# Altium PCB LED_Running_Light.PcbDoc
Units mil, origin at the board's own origin, x right, y up, seen from the top; angles counter-clockwise.
Board outline 6000 x 4000 mil, 2 copper layers (Top Layer, Bottom Layer); 27 components, 17 nets, 57 pads, 0 vias.
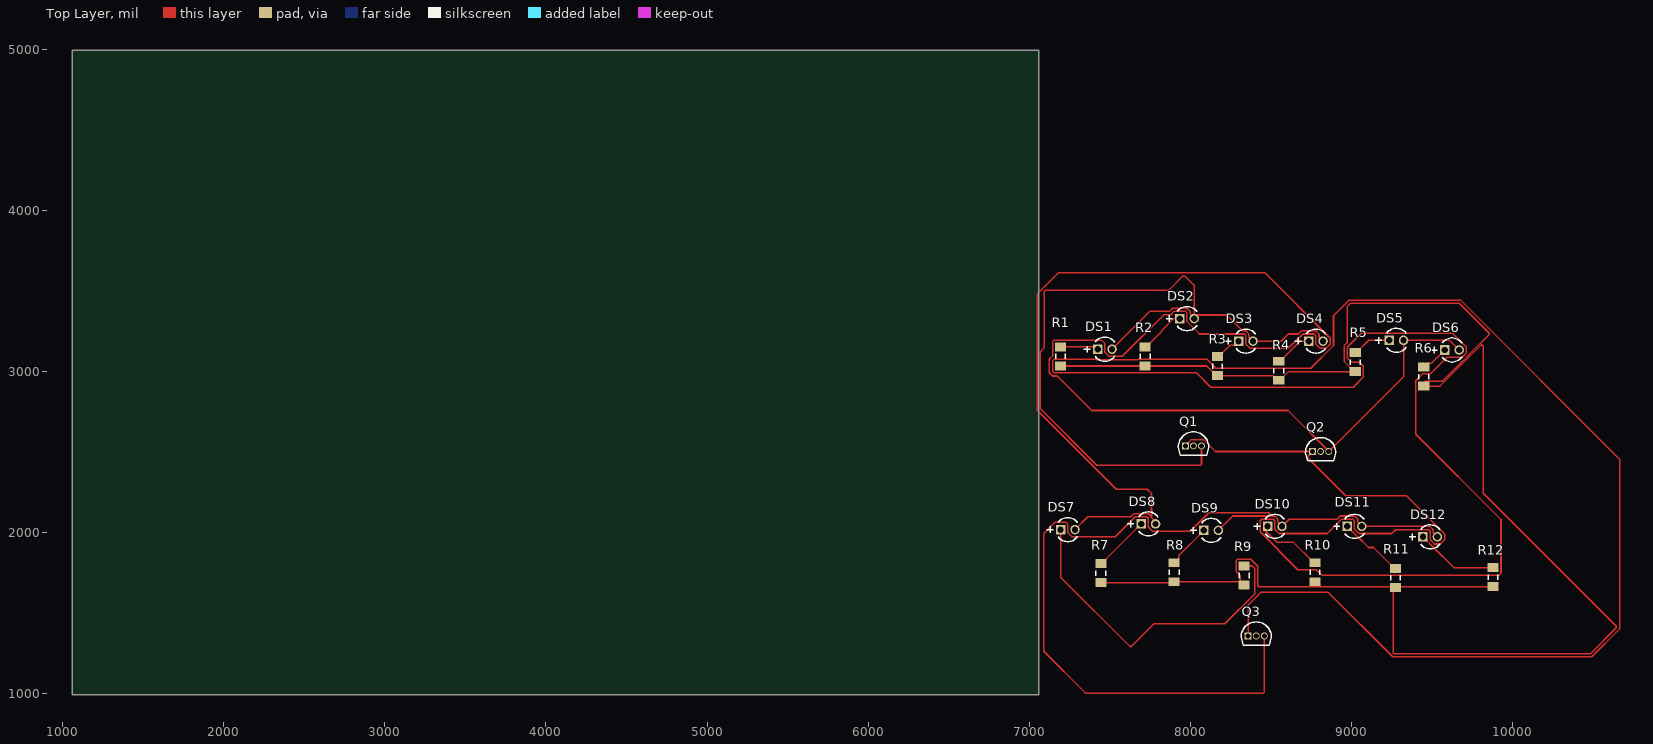
[diagram p0: Top Layer view]
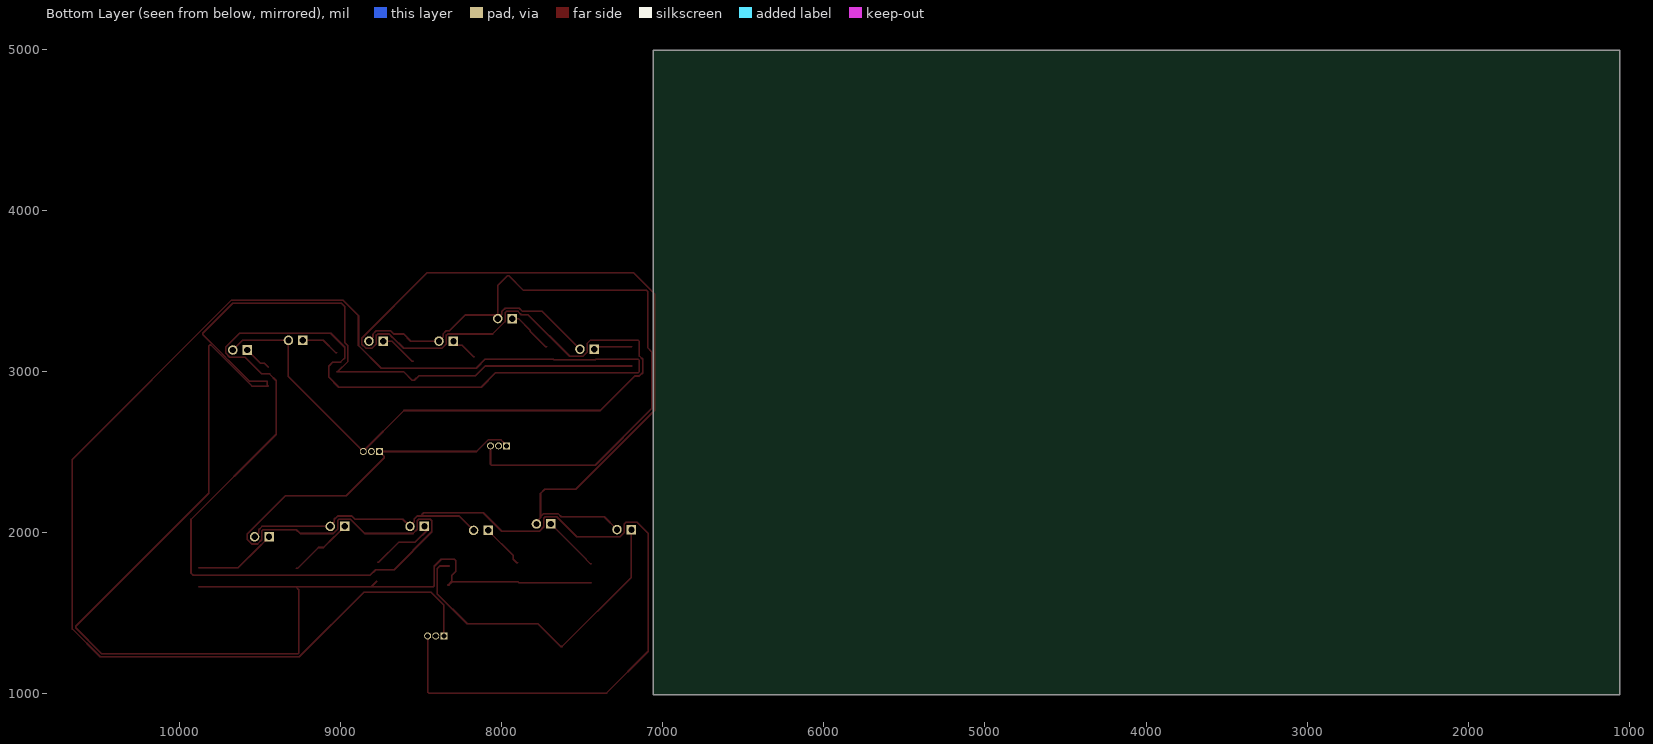
[diagram p1: Bottom Layer view, seen from below]

## Layer stack, top to bottom
Top Solder: solder mask 0.4, Solder Resist, Dk 3.5
Top Layer: signal copper 1.4
Dielectric 1: dielectric 12.6, FR-4, Dk 4.8
Bottom Layer: signal copper 1.4
Bottom Solder: solder mask 0.4, Solder Resist, Dk 3.5

## Board outline
1060,995 7060,995 7060,4995 1060,4995

## Design rules (kind name [scope] priority, off if disabled: settings)
Clearance [All] p1: gap=6 ignorepadtopadclearanceinfootprint=FALSE
PolygonConnect [All] p1: connectstyle=Relief reliefconductorwidth=10 reliefentries=4 polygonreliefangle="90 Angle" airgapwidth=10
RoutingVias [All] p1: holewidth=28 width=50 viastyle="Through Hole" minholewidth=28 minwidth=50 maxholewidth=28 maxwidth=50
SolderMaskExpansion [All] p1: expansion=0 istentingtop=FALSE
SupplyNets "Schematic Supply Nets_1" [InNet('GND')] p1: voltage=0.000
SupplyNets "Schematic Supply Nets" [InNet('VCC')] p2: voltage=0.000
Width [All] p1: maxlimit=10 minlimit=10 preferedwidth=10
30 further rules are at their usual default settings.

## Components (designator, comment, footprint, x,y, rotation, side; value= is the part's Value field where it differs from the comment)
DS1 "304090040" LED-2P-2.28-3MM 7470,3140 r0 top
DS2 "304090040" LED-2P-2.28-3MM 7980,3330 r0 top
DS3 "304090040" LED-2P-2.28-3MM 8345,3190 r0 top
DS4 "304090040" LED-2P-2.28-3MM 8780,3190 r0 top
DS5 "304090040" LED-2P-2.28-3MM 9279.88,3195 r0 top
DS6 "304090040" LED-2P-2.28-3MM 9625.12,3135 r0 top
DS7 "304090040" LED-2P-2.28-3MM 7240,2020 r0 top
DS8 "304090040" LED-2P-2.28-3MM 7740,2055 r0 top
DS9 "304090040" LED-2P-2.28-3MM 8130,2015 r0 top
DS10 "304090040" LED-2P-2.28-3MM 8525,2040 r0 top
DS11 "304090040" LED-2P-2.28-3MM 9020,2040 r0 top
DS12 "304090040" LED-2P-2.28-3MM 9490,1975 r0 top
Q1 "PN2222ABU" FAIR-TO-92 8020,2540 r0 top
Q2 "PN2222ABU" FAIR-TO-92 8810,2505 r0 top
Q3 "PN2222ABU" FAIR-TO-92 8410,1360 r0 top
R1 "Resistor 1k +/-1% 1206 250 mW" RESC3116X70X50ML13T20 7195,3095 r90 top value=1k
R2 "Resistor 1k +/-1% 1206 250 mW" RESC3116X70X50ML13T20 7720,3095 r90 top value=1k
R3 "Resistor 1k +/-1% 1206 250 mW" RESC3116X70X50ML13T20 8170,3035 r90 top value=1k
R4 "Resistor 1k +/-1% 1206 250 mW" RESC3116X70X50ML13T20 8550,3005.94 r90 top value=1k
R5 "Resistor 1k +/-1% 1206 250 mW" RESC3116X70X50ML13T20 9025,3060 r90 top value=1k
R6 "Resistor 1k +/-1% 1206 250 mW" RESC3116X70X50ML13T20 9450,2970 r90 top value=1k
R7 "Resistor 1k +/-1% 1206 250 mW" RESC3116X70X50ML13T20 7445,1750 r90 top value=1k
R8 "Resistor 1k +/-1% 1206 250 mW" RESC3116X70X50ML13T20 7900,1755 r90 top value=1k
R9 "Resistor 1k +/-1% 1206 250 mW" RESC3116X70X50ML13T20 8335,1735 r90 top value=1k
R10 "Resistor 1k +/-1% 1206 250 mW" RESC3116X70X50ML13T20 8775,1755 r90 top value=1k
R11 "Resistor 1k +/-1% 1206 250 mW" RESC3116X70X50ML13T20 9275,1720 r90 top value=1k
R12 "Resistor 1k +/-1% 1206 250 mW" RESC3116X70X50ML13T20 9880,1725 r90 top value=1k

## Footprints (in the part's own frame and the unit in brackets; to place one, negate y for a bottom-side part, rotate by r counter-clockwise, add the part's x,y. Pads: shape width x height; smd on the part's side, far side on the other; paste and mask are expansions set on the pad)
FAIR-TO-92 [mm] "TO, 3-Leads, Body Dia 4.79mm, Pitch 1.27mm"
  rect 1.1x1.1 hole 0.8: 1(-1.27,0)
  round 1.1 hole 0.8: 2(0,0) 3(1.27,0)
  silkscreen extent -2.39,-1.47 2.4,2.2, body extent -2.38,-1.47 2.38,2.19, height 4.82
LED-2P-2.28-3MM [mm] "LED, 2-Leads, Dia 3mm, Pitch 2.28mm"
  rect 1.5x1.5 hole 1: 1(-1.14,0)
  round 1.5 hole 1: 2(1.14,0)
  silkscreen extent -3.29,-1.9 1.52,1.9, body extent -1.9,-1.91 1.52,1.91, height 5.3
RESC3116X70X50ML13T20 [mm] "Chip Resistor, 2-Leads, Body 3.25x1.65mm, IPC Low Density"
  rect 1.4x1.75 smd: 1(-1.5,0) 2(1.5,0)
  silkscreen extent -0.4,-0.77 0.4,0.77, body extent -1.63,-0.82 1.63,0.82, height 0.7

## Part data
DS1 DS2 DS3 DS4 DS5 DS6 DS7 DS8 DS9 DS10 DS11 DS12: library part CMP-007-00006-2, "Green LED, 80 mW, 20 mA, -25 to 85 degC, 2-Pin THD", Manufacturer="Shenzhen CGX", Package Description="2-Pin Through Hole Device, Dia 3 mm, Pitch 2.28 mm", Case/Package=304090040, Datasheet URL=http://datasheet.octopart.com/304090040-Chengguangxing-datasheet-62330655.pdf, Datasheet Version="Rev. 1.0, 09/2014", Manufacturer URL=http://szcgx.com/, Mounting Technology=TH, Package Reference=304090040, RoHS Compliant=Unknown
Q1 Q2 Q3: library part CMP-013-00009-3, "NPN General-Purpose Amplifier, 40 V, -55 to 150 degC, 3-Pin TO-92, RoHS, Bulk", Case/Package=TO-226-3, Frequency=300MHz, Manufacturer=Fairchild, Max Operating Temperature=150°C, Min Operating Temperature=-55°C, Package Description="3-Pin Transistor Outline Package, Body Dia 4.79 mm, Pitch 1.27 mm", Package Quantity=1000, Package Reference=TO-92, Power=625mW, Datasheet URL=https://www.fairchildsemi.com/datasheets/PN/PN2222A.pdf, Datasheet Version="Rev. 1.1.0, 07/2014", Elements=1, hFE Min=100, Mounting Technology=TH, Packaging=Bulk, Pins=3, RoHS Compliant=True, Vce Max=1V
R1 R2 R3 R4 R5 R6 R7 R8 R9 R10 R11 R12: library part CMP-009-00011-5, "Chip Resistor, 1 KOhm, +/- 1%, 0.25 W, -55 to 155 degC, 1206 (3216 Metric)", Case/Package=1206, Max Operating Temperature=155°C, Min Operating Temperature=-55°C, Power=250mW, Tolerance=1%, Voltage Rating=200V, Mounting Technology=SM, Pins=2, RoHS Compliant=True

## Nets (pads, with @x,y where several pads share a name; then routed paths per layer and width w, separated by ;. In a path a pad name is that pad's centre, name@x,y a point inside that pad or via, vN(x,y) a via of type N, cw(c..) or ccw(c..) an arc to the next point about the centre after c; other vN are vias at no path point)
GND: Q1.1 Q2.1 Q3.1 | length 18092.8
  Top Layer w10: Q1.1 7986.65,2556.65 7986.65,2558.49 8004.82,2576.65 8085.18,2576.65 8156.84,2505 Q2.1 8729.2,2474.2 8729.2,2465.92 8965.44,2229.68 9343.17,2229.68 9579.41,1993.44 9579.41,1956.56 9553.33,1930.47 9516.44,1930.47 9489.65,1957.26 9489.65,2010.74 9480.86,2019.53 9275.68,2019.53 9251.62,1995.47 9046.44,1995.47 9019.65,2022.26 9019.65,2075.74 9010.86,2084.53 8939.38,2084.53 8850.32,1995.47 8551.44,1995.47 8524.65,2022.26 8524.65,2075.74 8515.86,2084.53 8444.38,2084.53 8434.14,2074.29 8434.14,2005.71 8668.35,1771.5 8782.67,1771.5 8817.67,1736.5 9915.66,1736.5 9929.45,1750.28 9929.45,2083.05 9400.55,2611.95 9400.55,2944.72 9442.33,2986.5 9490.66,2986.5 9594.64,3090.47 9688.44,3090.47 9714.53,3116.56 9714.53,3153.44 9628.44,3239.53 9062.25,3239.53 8975.55,3152.83 8975.55,3085.28 9000.83,3060 9049.17,3060 9074.45,3034.72 9074.45,2967.17 9011.61,2904.33 8127.5,2904.33 8038.44,2993.39 7154.34,2993.39 7145.55,3002.17 7145.55,3069.72 7154.34,3078.5 7413.81,3078.5 7416.84,3075.47 7676.31,3075.47 7679.34,3078.5 8102.33,3078.5 8158.39,3022.44 8748.58,3022.44 8889.41,3163.27 8889.41,3347.69 8986.72,3445 9678.28,3445 10665.86,2457.43 10665.86,1402.57 10493.28,1230 9257.57,1230 8855.86,1631.72 8440,1631.72 8360,1551.72 Q3.1
NetDS1_1: DS1.1 R1.2 | length 235.9
  Top Layer w10: R1.2 7411.06,3154.06 DS1.1
NetDS1_2: DS1.2 DS2.2 DS3.2 DS4.2 Q1.3 | length 4787.9
  Top Layer w10: DS1.2 7749.41,3374.53 7871.09,3374.53 7891.09,3394.53 7979.14,3394.53 7999.65,3374.03 7999.65,3355.24 8002.62,3352.26 DS2.2@8024.88,3352.26 ; DS2.2 DS2.2@8024.88,3352.26 ; Q1.3 8070,2425.86 8064.14,2420 7420,2420 7070,2770 7070,3125 7095,3150 7095,3499.14 7100.86,3505 7865,3505 7955.86,3595.86 7964.14,3595.86 8024.88,3535.12 DS2.2@8024.88,3352.26 ; DS4.2 8799.65,3215.24 8799.65,3234.03 8779.14,3254.53 8691.09,3254.53 8671.09,3234.53 8609.27,3234.53 8564.74,3190 DS3.2 8364.65,3215.24 8364.65,3234.03 8344.14,3254.53 8325.35,3254.53 8227.62,3352.26 DS2.2@8024.88,3352.26
NetDS2_1: DS2.1 R2.2 | length 292
  Top Layer w10: R2.2 7726.89,3154.06 7822.7,3249.86 7822.7,3256.75 7895.94,3330 DS2.1
NetDS3_1: DS3.1 R3.2 | length 169.9
  Top Layer w10: R3.2 8176.89,3094.06 8248.31,3165.47 8275.59,3165.47 DS3.1
NetDS4_1: DS4.1 R4.2 | length 236.9
  Top Layer w10: R4.2 8556.89,3065 8681.89,3190 DS4.1
NetDS5_1: DS5.1 R5.2 | length 241.5
  Top Layer w10: R5.2 9031.89,3119.06 9107.83,3195 DS5.1
NetDS5_2: DS5.2 DS6.2 DS7.2 DS8.2 Q2.3 | length 10031.9
  Top Layer w10: DS7.2 7364.41,2099.53 7631.09,2099.53 7651.09,2119.53 7739.14,2119.53 7759.65,2099.03 ; DS8.2 7784.88,2067.5 7759.65,2092.74 7759.65,2099.03 ; DS6.2 9610,3195 DS5.2 9324.76,2969.76 Q2.3 8860,2506.84 8607.35,2759.49 7388.24,2759.49 7174.34,2973.39 7146.05,2973.39 7125.55,2993.89 7125.55,3078 7145.55,3098 7145.55,3187.83 7154.34,3196.61 7448.77,3196.61 7470.35,3175.03 7470.35,3121.56 7496.44,3095.47 7578.2,3095.47 7837.25,3354.53 7879.38,3354.53 7899.38,3374.53 7970.86,3374.53 7979.65,3365.74 7979.65,3312.26 8057.38,3234.53 8335.86,3234.53 8344.65,3225.74 8344.65,3172.26 8371.44,3145.47 8609.08,3145.47 8678.13,3214.53 8679.38,3214.53 8699.38,3234.53 8770.86,3234.53 8779.65,3225.74 8779.65,3172.26 8806.44,3145.47 8843.33,3145.47 8869.41,3171.56 8869.41,3208.44 8462,3615.86 7183.43,3615.86 7050,3482.43 7050,2761.72 7541.72,2270 7734.14,2270 7759.65,2244.5 7759.65,2099.03
NetDS6_1: DS6.1 R6.2 | length 174.1
  Top Layer w10: R6.2 9472.56,3051.61 9496.85,3051.61 DS6.1
NetDS7_1: DS7.1 R9.2 | length 2050.2
  Top Layer w10: DS7.1 7195.12,1724.88 7625.86,1294.14 7634.14,1294.14 7775,1435 8215,1435 8400,1620 8400,1778.5 8384.45,1794.06 R9.2@8328.11,1794.06
NetDS8_1: DS8.1 R7.2 | length 353.6
  Top Layer w10: R7.2 7451.89,1809.06 7474.45,1831.61 7474.45,1834.33 DS8.1
NetDS9_1: DS9.1 R8.2 | length 281.7
  Top Layer w10: R8.2 7906.89,1814.06 7929.45,1836.61 7929.45,1859.33 DS9.1
NetDS9_2: DS9.2 DS10.2 DS11.2 DS12.2 Q3.3 | length 5784.1
  Top Layer w10: DS9.2 8264.41,2104.53 8505.35,2104.53 ; Q3.3 8460,1010.86 8454.14,1005 7350,1005 7090,1265 7090,1995.15 7159.38,2064.53 7230.86,2064.53 7240.35,2055.03 7240.35,2001.56 7266.44,1975.47 7535.32,1975.47 7659.38,2099.53 7730.86,2099.53 7739.65,2090.74 7739.65,2037.26 7766.44,2010.47 8000.32,2010.47 8114.38,2124.53 8485.35,2124.53 8505.35,2104.53 ; DS12.2 9509.65,2000.24 9509.65,2019.03 9489.14,2039.53 9470.35,2039.53 9469.88,2040 DS11.2 9039.65,2065.24 9039.65,2084.03 9019.14,2104.53 8931.09,2104.53 8911.09,2084.53 8614.41,2084.53 DS10.2 8544.65,2065.24 8544.65,2084.03 8524.14,2104.53 8505.35,2104.53
NetDS10_1: DS10.1 R10.2 | length 433.7
  Top Layer w10: DS10.1 8465.98,2025.86 8454.14,2025.86 8539.67,1940.33 8640.89,1940.33 8763.11,1818.11 R10.2@8770,1818.11
NetDS11_1: DS11.1 R11.2 | length 408.8
  Top Layer w10: DS11.1 8999.65,2015.47 8999.65,2013.98 9038.15,1975.47 9039.65,1975.47 9106.57,1908.54 9138.62,1908.54 9268.11,1779.06 R11.2
NetDS12_1: DS12.1 R12.2 | length 514.8
  Top Layer w10: DS12.1 9469.65,1950.47 9469.65,1948.98 9508.15,1910.47 9509.65,1910.47 9636.06,1784.06 R12.2
VCC: R1.1 R2.1 R3.1 R4.1 R5.1 R6.1 R7.1 R8.1 R9.1 R10.1 R11.1 R12.1 | length 11143.9
  Top Layer w10: R1.1 R2.1 8103.11,3035.94 8163.11,2975.94 R3.1 8514.06,2975.94 8543.11,2946.89 R4.1 8556.89,2946.89 8610.94,3000.94 R5.1@9018.11,3000.94 ; R7.1 7895,1690.94 R8.1 8308.11,1695.94 R9.1@8328.11,1675.94 ; R9.1 8333.84,1675.94 8311.28,1698.5 8311.28,1734.56 8285.55,1760.28 8285.55,1827.83 8294.34,1836.61 8375.66,1836.61 8420,1792.28 8420,1671.8 8425.86,1665.94 R12.1 ; R10.1@8776.89,1700 8810.94,1665.94 ; R5.1 R5.1@9018.11,3000.94 ; R11.1 9260,1645.94 9260,1255.86 9265.86,1250 10485,1250 10645.86,1410.86 10645.86,1419.14 9820,2245 9820,3160 9814.14,3165.86 9805.86,3165.86 9550.94,2910.94 R6.1 9455.86,2916.8 9455.86,2940 9565,2940 9695.47,3070.47 9696.73,3070.47 9734.53,3108.27 9734.53,3109.53 9855.86,3230.86 9855.86,3239.14 9670,3425 8995,3425 8975.55,3405.55 8975.55,3181.11 8955.55,3161.11 8955.55,3063.5 R5.1@9018.11,3000.94
pads on no net: Q1.2 Q2.2 Q3.2